# Altium PCB HTY-21024B V02.PcbDoc
Units mm, origin at the board's own origin, x right, y up, seen from the top; angles counter-clockwise.
Board outline 33.85 x 34.13 mm, 2 copper layers (Top Layer, Bottom Layer); 7 components, 5 nets, 18 pads, 1 vias.
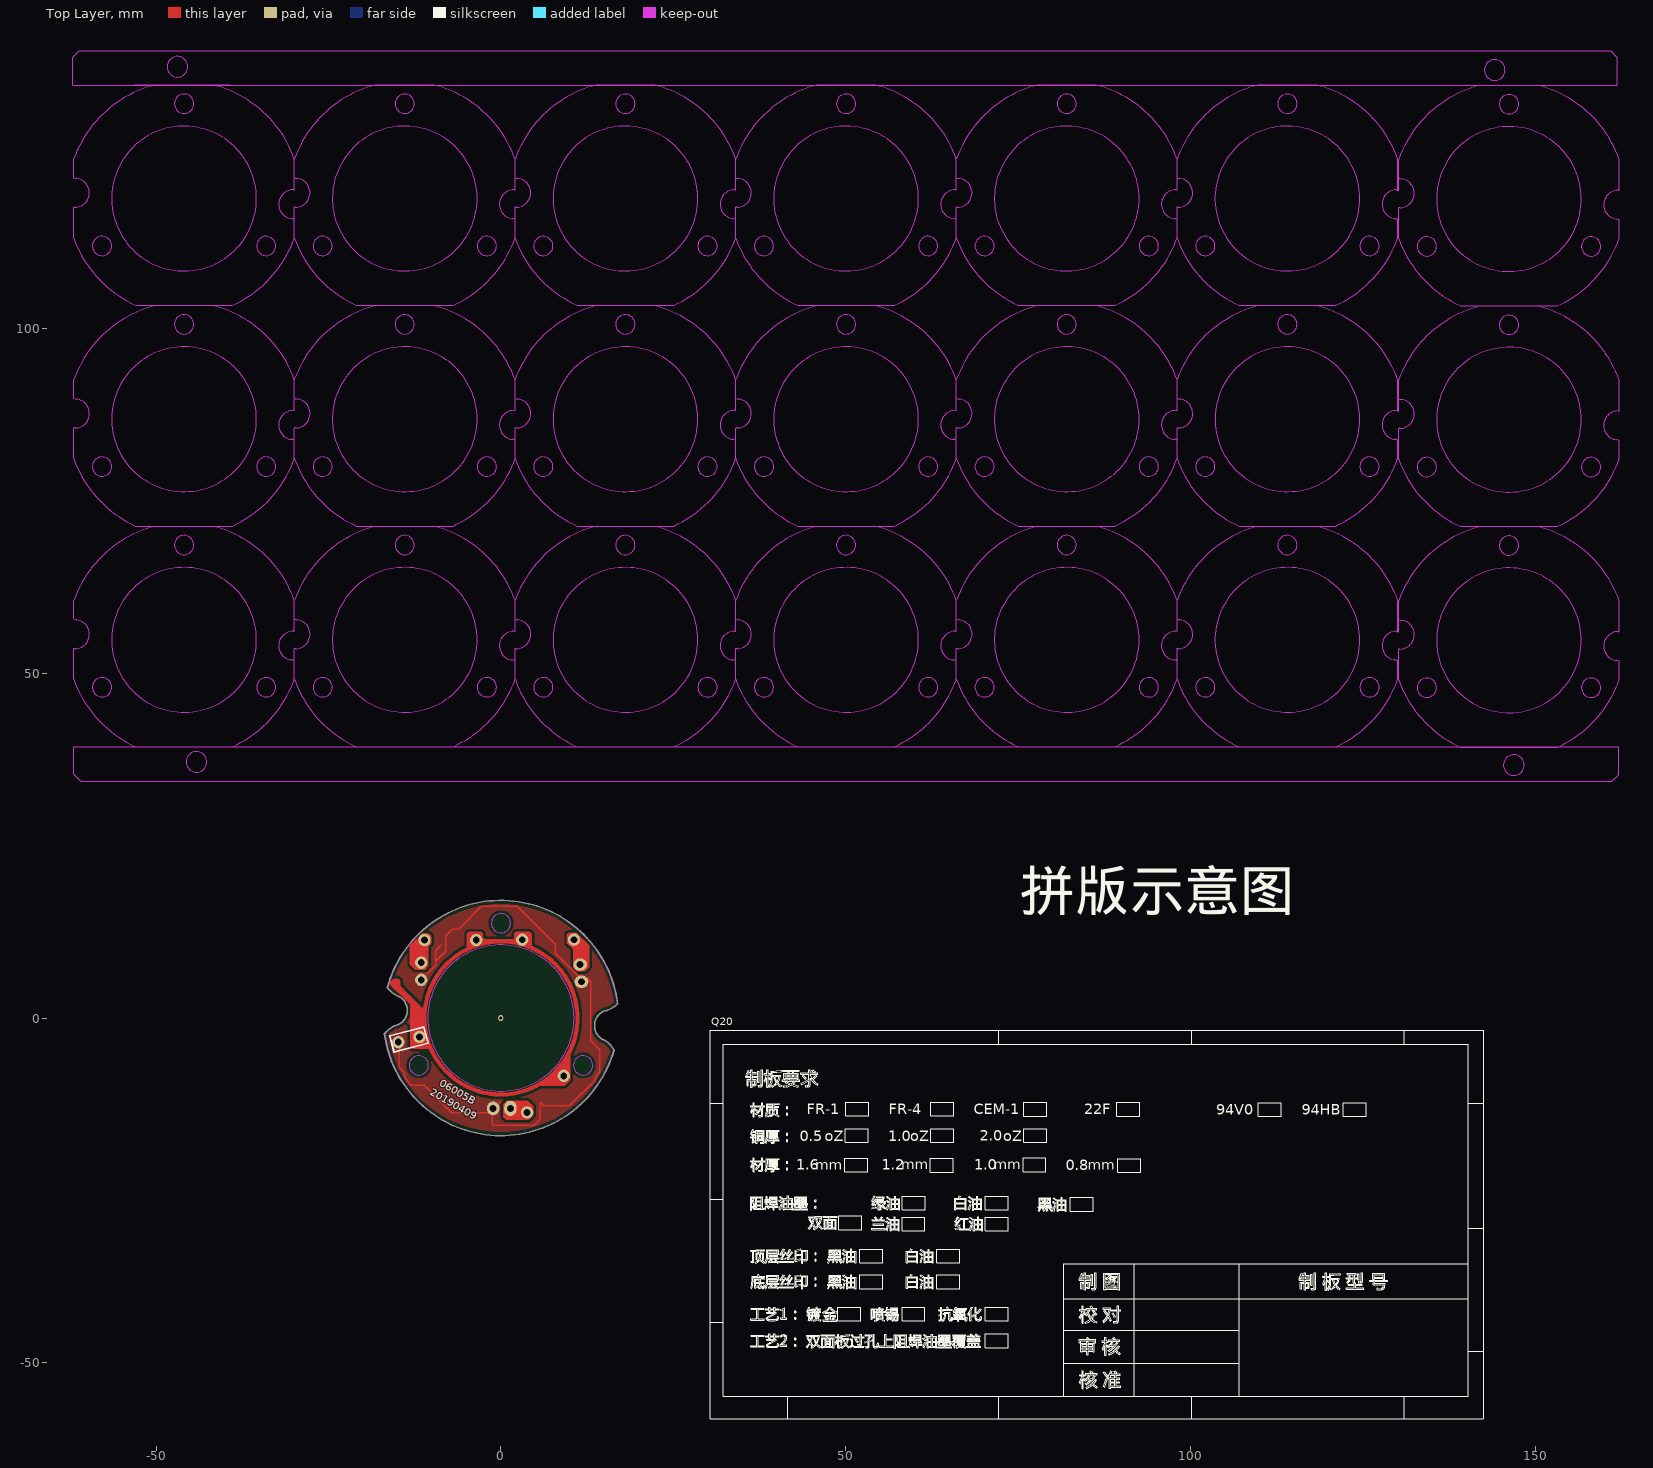
[diagram p0: Top Layer view]
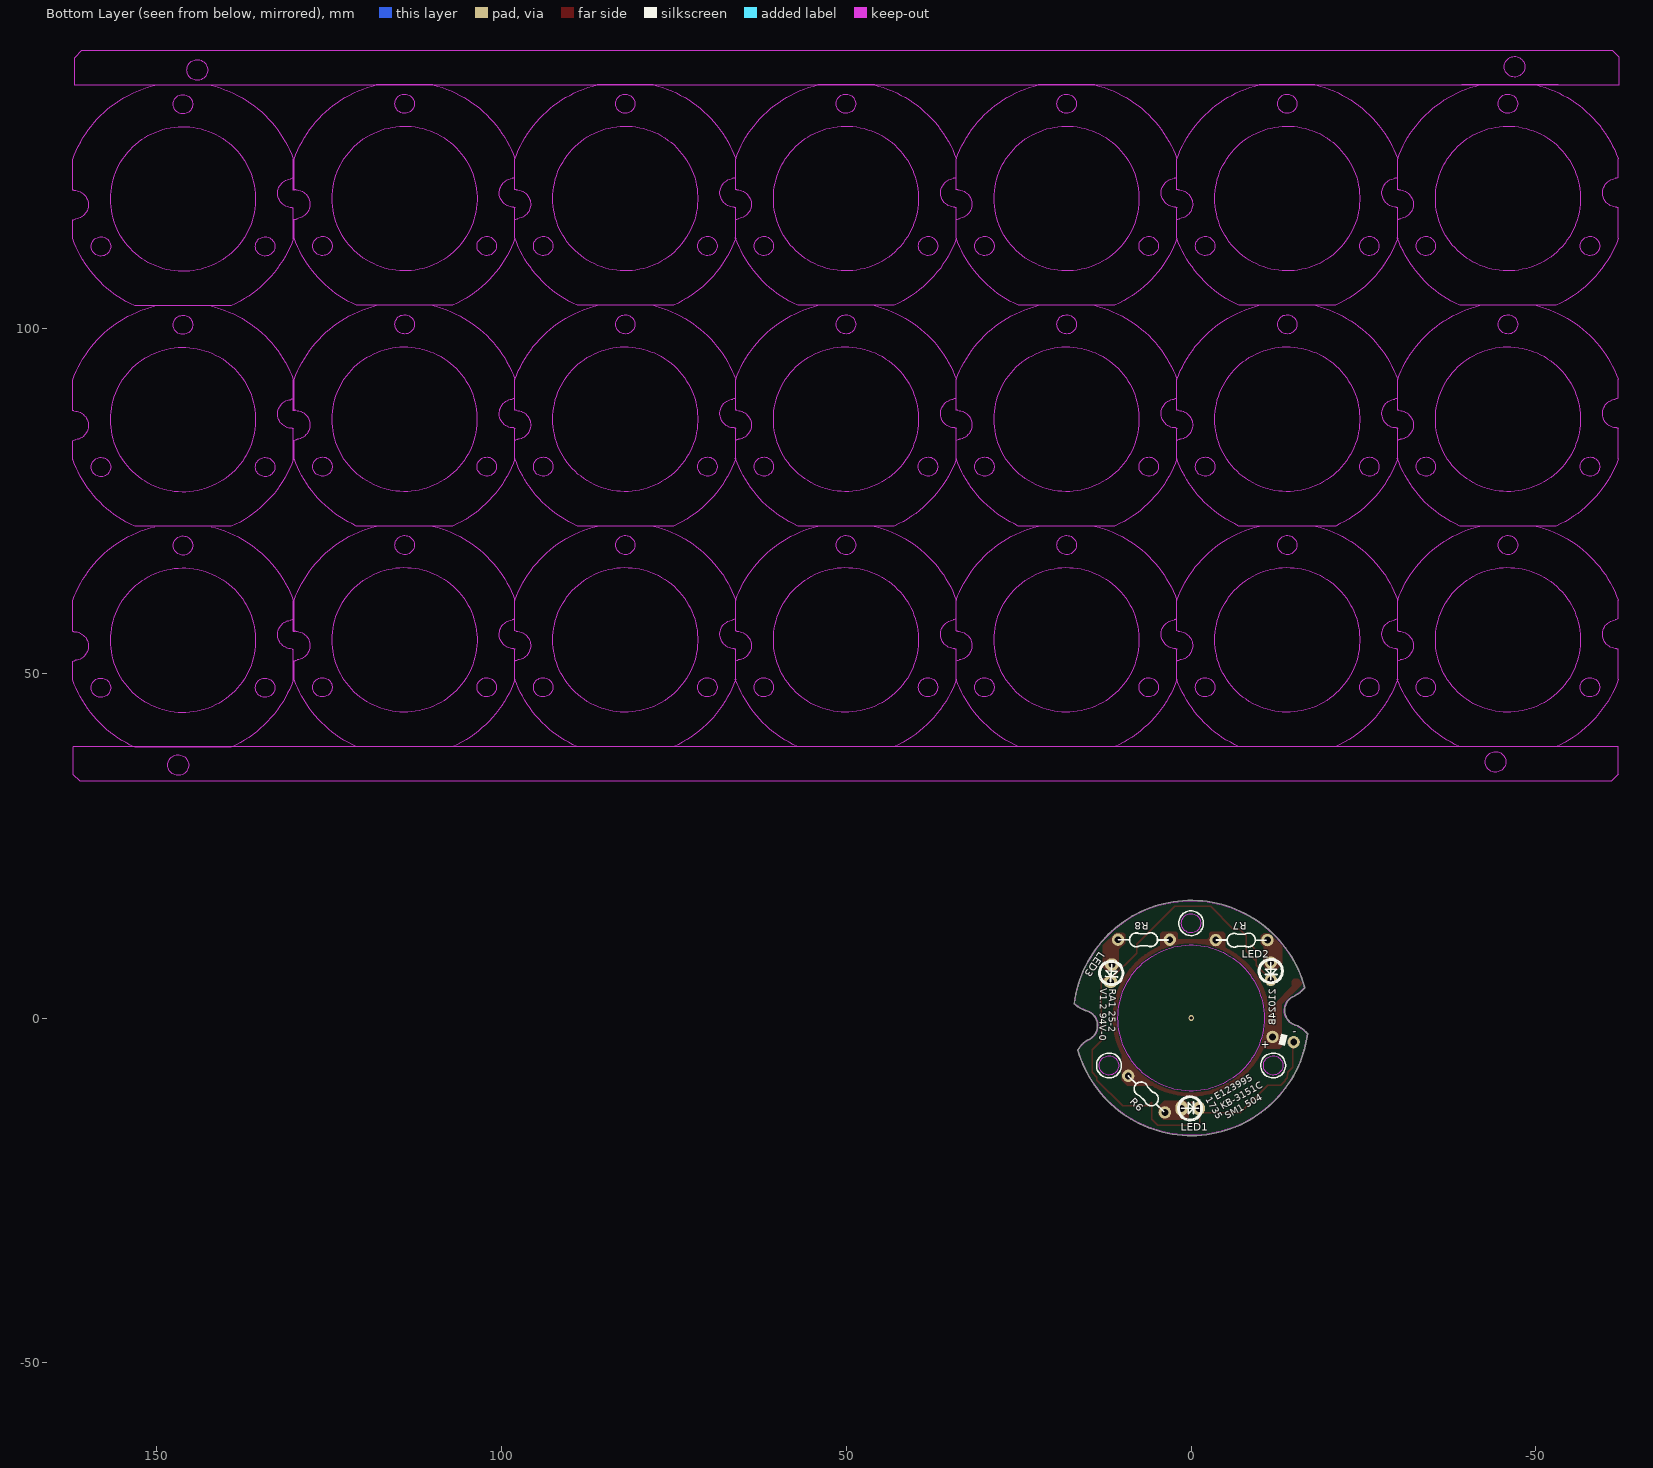
[diagram p1: Bottom Layer view, seen from below]

## Layer stack, top to bottom
Top Solder: solder mask 0.0102, Solder Resist, Dk 3.5
Top Layer: signal copper 0.0356
Dielectric 1: dielectric 0.32, FR-4, Dk 4.8
Bottom Layer: signal copper 0.0356
Bottom Solder: solder mask 0.0102, Solder Resist, Dk 3.5

## Board outline
-16.908,-2.297 cw(c-16.845,-2.288) -16.834,-2.226 cw(c-13.676,-4.776) -15.45,-1.125 cw(c-15.395,-1.156) -15.406,-1.094 ccw(c-15.811,1.105) -13.575,1.105 ccw(c-15.811,1.105) -15,3.189 ccw(c-15.811,1.105) -15,3.189 cw(c-14.977,3.249) -15.004,3.191 cw(c-13.261,6.857) -16.469,4.369 cw(c-16.418,4.409) -16.48,4.425 cw(c0,0) 16.936,2.089 cw(c16.872,2.081) 16.936,2.081 cw(c16.872,2.081) 16.913,2.032 cw(c14.086,4.944) 15.303,1.072 cw(c15.283,1.133) 15.297,1.07 cw(c15.811,-1.106) 15.298,1.071 15.297,1.07 ccw(c15.811,-1.106) 15.104,-3.227 ccw(c15.811,-1.106) 15.104,-3.227 cw(c15.084,-3.288) 15.119,-3.234 cw(c12.882,-6.622) 16.405,-4.605 cw(c16.35,-4.637) 16.413,-4.633 cw(c16.352,-4.65) 16.416,-4.65 cw(c16.352,-4.65) 16.413,-4.667 cw(c0,0)

## Design rules (kind name [scope] priority, off if disabled: settings)
Clearance [All] p1: gap=0.4
PlaneConnect [All] p1: planeconnectstyle=Direct reliefexpansion=0.508 reliefentries=4 reliefconductorwidth=0.254 reliefairgap=0.254
PolygonConnect [All] p1: connectstyle=Direct reliefconductorwidth=0.254 reliefentries=4 polygonreliefangle="90 Angle" airgapwidth=0.254
RoutingVias [All] p1: holewidth=0.711 width=1.27 viastyle="Through Hole" minholewidth=0.711 minwidth=1.27 maxholewidth=0.711 maxwidth=1.27
SolderMaskExpansion [All] p1: expansion=0.102
Width [All] p1: maxlimit=0.254 minlimit=0.254 preferedwidth=0.254
29 further rules are at their usual default settings.

## Components (designator, comment, footprint, x,y, rotation, side; value= is the part's Value field where it differs from the comment)
LED1 "" LED3#1 0.127,-13.106 r0 bottom
LED2 "" LED3#2 -11.557,6.782 r90 bottom
LED3 "" LED3#3 11.582,6.502 r94 bottom
Q20 "" Logo 50.495,-42.774 r0 top
R6 "" RR1/8W 9.113,-8.387 r225 bottom
R7 "" RR1/8W -3.581,11.303 r180 bottom
R8 "" RR1/8W 10.592,11.354 r180 bottom

## Footprints (in the part's own frame and the unit in brackets; to place one, negate y for a bottom-side part, rotate by r counter-clockwise, add the part's x,y. Pads: shape width x height; smd on the part's side, far side on the other; paste and mask are expansions set on the pad)
LED3#1 [mm] "3mm"
  oval 1.8x2.2 hole 1: 1(1.25,0)
  oval 1.8x2 hole 1: 2(-1.25,0)
  silkscreen extent -1.58,-1.6 1.62,1.6
LED3#2 [mm] "3mm"
  round 1.8 hole 1: 1(1.25,0) 2(-1.25,0)
  silkscreen extent -1.58,-1.6 1.62,1.6
LED3#3 [mm] "3mm"
  oval 1.8x2 hole 1: 1(1.25,0) 2(-1.25,0)
  silkscreen extent -1.58,-1.6 1.62,1.6
Logo [mm]
  round 0.069 on Top Overlay: 1(-1.614,-1.16) 1(-1.614,-1.16) 1(-1.614,0.802) 1(-1.614,0.802)
  silkscreen extent -20.13,-15.36 91.93,40.98
RR1/8W [mm]
  round 1.8 hole 1 mask+0: 1(0,0) 2(7.5,0)
  silkscreen extent 0.05,-1.02 7.3,1

## Free pads (board coordinates)
  round 1.8 hole 1 mask+0: 2(-14.884,-3.505) 3(-11.811,-2.743)

## Via types
v1: diameter 0.8, hole 0.5, Top Layer to Bottom Layer, tented both sides, 1 vias

## Nets (pads, with @x,y where several pads share a name; then routed paths per layer and width w, separated by ;. In a path a pad name is that pad's centre, name@x,y a point inside that pad or via, vN(x,y) a via of type N, cw(c..) or ccw(c..) an arc to the next point about the centre after c; other vN are vias at no path point)
NewNet1: LED1.1 R6.2 | length 2.9
  Top Layer w0.2: LED1.1@1.225,-13.742 1.733,-14.25 3.271,-14.25 3.398,-14.377 R6.2@3.861,-14.377
NewNet2: pad.3 R6.1 R7.1 R8.2 | length 80.6
  Top Layer w0.2: R7.1 R8.2@3.041,11.303
  Top Layer w0.254: pad.3 -10.949,-3.582 -10.611,-3.244
  Top Layer w0.6: -14.83,5.055 ccw(c-15.24,5.055) -14.83,5.055 ; -10.611,-3.244 ccw(c0,0) 11.096,0 ccw(c0,0) -10.611,-3.244
NewNet3: LED3.1 R8.1 | length 4.3
  Top Layer w0.2: R8.1 11.964,9.982 11.964,8.616 LED3.1@11.262,7.915
NewNet4: LED2.1 R7.2 | length 3.6
  Top Layer w0.254: LED2.1@-11.673,7.907 -11.673,10.711 R7.2
NewNet5: LED1.2 LED2.2 LED3.2 pad.2 | length 97.3
  Top Layer w0.2: -14.847,-2.303 -14.82,-2.278 ; pad.2@-14.757,-2.82 -14.757,-7.138 -14.021,-7.874 -14.021,-8.216 -13.959,-8.278 -13.959,-8.633 -13.662,-8.93 -13.662,-9.071 -13.005,-9.728 -11.15,-9.728 -7.137,-13.742 LED1.2@-1.275,-13.742 ; -9.463,8.215 -8.026,9.652 -8.026,11.912 -7.036,12.903 -6.147,12.903 -2.845,16.205 2.362,16.205 7.9,10.668 7.9,9.423 LED3.2@11.573,5.75 ; -0.025,-12.116 -1.275,-13.366 LED1.2@-1.275,-13.742 ; LED3.2@12.512,5.75 13.03,5.232 13.03,-3.302 14.351,-4.623 14.351,-7.899 13.662,-8.588 13.662,-8.995 9.932,-12.726 6.198,-12.726 5.715,-12.243 5.715,-14.681 4.852,-15.545 -1.067,-15.545 -1.275,-15.336 LED1.2@-1.275,-13.742
  Top Layer w0.254: LED2.2@-11.673,5.407 -11.673,5.437 -9.463,7.647 -9.463,8.215 -9.463,9.781 -8.701,10.543
pads on no net: Q20.1
copper on no net:
  other v1: 0,0

## Polygon pours and split planes (outlines as drawn)
NewNet5 on Top Layer "dg" (solid, remove dead copper, pour order 2): -16.838,-2.287 -16.838,-7.318 -11.252,-12.903 -7.213,-16.942 2.058,-16.942 7.163,-16.942 15.139,-8.966 16.764,-7.341 16.764,2.819 16.764,7.34 7.696,16.408 7.011,17.094 -0.838,17.094 -6.959,17.094 -15.24,8.814 -16.845,7.208 -16.845,-2.288
NewNet2 on Top Layer "dg" (solid, remove dead copper, pour order 0): -12.573,-1.651 -16.357,2.133 -16.357,4.343 -16.357,5.537 -15.875,6.02 -11.15,1.295 -11.15,1.143 -11.15,-0.381 -12.42,-1.651

## Keep-outs
Keep-Out Layer:
  circle w0.127: c-46.914,137.947 r1.5
  circle w0.127: c144.123,137.479 r1.5
  circle w0.127: c158.1,47.896 r1.4
  circle w0.127: c134.284,47.896 r1.4
  circle w0.127: c146.192,68.521 r1.4
  circle w0.127: c146.192,54.771 r10.5
  circle w0.127: c146.192,54.771 r10.5
  circle w0.127: c146.192,68.521 r1.4
  circle w0.127: c134.284,47.896 r1.4
  circle w0.127: c158.1,47.896 r1.4
  circle w0.127: c158.1,79.897 r1.4
  circle w0.127: c134.284,79.897 r1.4
  circle w0.127: c146.192,100.522 r1.4
  circle w0.127: c146.192,86.772 r10.5
  circle w0.127: c146.192,86.772 r10.5
  circle w0.127: c146.192,100.522 r1.4
  circle w0.127: c134.284,79.897 r1.4
  circle w0.127: c158.1,79.897 r1.4
  circle w0.127: c158.1,111.896 r1.4
  circle w0.127: c134.284,111.896 r1.4
  circle w0.127: c146.192,132.521 r1.4
  circle w0.127: c146.192,118.771 r10.5
  circle w0.127: c146.192,118.771 r10.5
  circle w0.127: c146.192,132.521 r1.4
  circle w0.127: c134.284,111.896 r1.4
  circle w0.127: c158.1,111.896 r1.4
  circle w0.127: c11.908,-6.875 r1.4
  circle w0.127: c-11.908,-6.875 r1.4
  circle w0.127: c0,13.75 r1.4
  circle w0.127: c0,0 r10.6
  circle w0.127: c-44.148,37.146 r1.5
  circle w0.127: c146.888,36.678 r1.5
  circle w0.127: c-34.041,111.963 r1.4
  circle w0.127: c-57.856,111.963 r1.4
  circle w0.127: c-45.948,132.588 r1.4
  circle w0.127: c-45.948,118.838 r10.5
  circle w0.127: c-45.948,118.838 r10.5
  circle w0.127: c-45.948,132.588 r1.4
  circle w0.127: c-57.856,111.963 r1.4
  circle w0.127: c-34.041,111.963 r1.4
  circle w0.127: c-2.041,111.963 r1.4
  circle w0.127: c-25.856,111.963 r1.4
  circle w0.127: c-13.948,132.588 r1.4
  circle w0.127: c-13.948,118.838 r10.5
  circle w0.127: c-13.948,118.838 r10.5
  circle w0.127: c-13.948,132.588 r1.4
  circle w0.127: c-25.856,111.963 r1.4
  circle w0.127: c-2.041,111.963 r1.4
  circle w0.127: c61.959,111.963 r1.4
  circle w0.127: c38.144,111.963 r1.4
  circle w0.127: c50.052,132.588 r1.4
  circle w0.127: c50.052,118.838 r10.5
  circle w0.127: c50.052,118.838 r10.5
  circle w0.127: c50.052,132.588 r1.4
  circle w0.127: c38.144,111.963 r1.4
  circle w0.127: c61.959,111.963 r1.4
  circle w0.127: c29.959,111.963 r1.4
  circle w0.127: c6.144,111.963 r1.4
  circle w0.127: c18.052,132.588 r1.4
  circle w0.127: c18.052,118.838 r10.5
  circle w0.127: c18.052,118.838 r10.5
  circle w0.127: c18.052,132.588 r1.4
  circle w0.127: c6.144,111.963 r1.4
  circle w0.127: c29.959,111.963 r1.4
  circle w0.127: c125.959,111.963 r1.4
  circle w0.127: c102.144,111.963 r1.4
  circle w0.127: c114.052,132.588 r1.4
  circle w0.127: c114.052,118.838 r10.5
  circle w0.127: c114.052,118.838 r10.5
  circle w0.127: c114.052,132.588 r1.4
  circle w0.127: c102.144,111.963 r1.4
  circle w0.127: c125.959,111.963 r1.4
  circle w0.127: c93.959,111.963 r1.4
  circle w0.127: c70.144,111.963 r1.4
  circle w0.127: c82.052,132.588 r1.4
  circle w0.127: c82.052,118.838 r10.5
  circle w0.127: c82.052,118.838 r10.5
  circle w0.127: c82.052,132.588 r1.4
  circle w0.127: c70.144,111.963 r1.4
  circle w0.127: c93.959,111.963 r1.4
  circle w0.127: c-34.04,79.964 r1.4
  circle w0.127: c-57.856,79.964 r1.4
  circle w0.127: c-45.948,100.589 r1.4
  circle w0.127: c-45.948,86.839 r10.5
  circle w0.127: c-45.948,86.839 r10.5
  circle w0.127: c-45.948,100.589 r1.4
  circle w0.127: c-57.856,79.964 r1.4
  circle w0.127: c-34.04,79.964 r1.4
  circle w0.127: c-2.04,79.964 r1.4
  circle w0.127: c-25.856,79.964 r1.4
  circle w0.127: c-13.948,100.589 r1.4
  circle w0.127: c-13.948,86.839 r10.5
  circle w0.127: c-13.948,86.839 r10.5
  circle w0.127: c-13.948,100.589 r1.4
  circle w0.127: c-25.856,79.964 r1.4
  circle w0.127: c-2.04,79.964 r1.4
  circle w0.127: c61.96,79.964 r1.4
  circle w0.127: c38.144,79.964 r1.4
  circle w0.127: c50.052,100.589 r1.4
  circle w0.127: c50.052,86.839 r10.5
  circle w0.127: c50.052,86.839 r10.5
  circle w0.127: c50.052,100.589 r1.4
  circle w0.127: c38.144,79.964 r1.4
  circle w0.127: c61.96,79.964 r1.4
  circle w0.127: c29.96,79.964 r1.4
  circle w0.127: c6.144,79.964 r1.4
  circle w0.127: c18.052,100.589 r1.4
  circle w0.127: c18.052,86.839 r10.5
  circle w0.127: c18.052,86.839 r10.5
  circle w0.127: c18.052,100.589 r1.4
  circle w0.127: c6.144,79.964 r1.4
  circle w0.127: c29.96,79.964 r1.4
  circle w0.127: c125.96,79.964 r1.4
  circle w0.127: c102.144,79.964 r1.4
  circle w0.127: c114.052,100.589 r1.4
  circle w0.127: c114.052,86.839 r10.5
  circle w0.127: c114.052,86.839 r10.5
  circle w0.127: c114.052,100.589 r1.4
  circle w0.127: c102.144,79.964 r1.4
  circle w0.127: c125.96,79.964 r1.4
  circle w0.127: c93.96,79.964 r1.4
  circle w0.127: c70.144,79.964 r1.4
  circle w0.127: c82.052,100.589 r1.4
  circle w0.127: c82.052,86.839 r10.5
  circle w0.127: c82.052,86.839 r10.5
  circle w0.127: c82.052,100.589 r1.4
  circle w0.127: c70.144,79.964 r1.4
  circle w0.127: c93.96,79.964 r1.4
  circle w0.127: c93.959,47.963 r1.4
  circle w0.127: c70.144,47.963 r1.4
  circle w0.127: c82.052,68.588 r1.4
  circle w0.127: c82.052,54.838 r10.5
  circle w0.127: c82.052,54.838 r10.5
  circle w0.127: c82.052,68.588 r1.4
  circle w0.127: c70.144,47.963 r1.4
  circle w0.127: c93.959,47.963 r1.4
  circle w0.127: c125.959,47.963 r1.4
  circle w0.127: c102.144,47.963 r1.4
  circle w0.127: c114.052,68.588 r1.4
  circle w0.127: c114.052,54.838 r10.5
  circle w0.127: c114.052,54.838 r10.5
  circle w0.127: c114.052,68.588 r1.4
  circle w0.127: c102.144,47.963 r1.4
  circle w0.127: c125.959,47.963 r1.4
  circle w0.127: c29.959,47.963 r1.4
  circle w0.127: c6.144,47.963 r1.4
  circle w0.127: c18.052,68.588 r1.4
  circle w0.127: c18.052,54.838 r10.5
  circle w0.127: c18.052,54.838 r10.5
  circle w0.127: c18.052,68.588 r1.4
  circle w0.127: c6.144,47.963 r1.4
  circle w0.127: c29.959,47.963 r1.4
  circle w0.127: c61.959,47.963 r1.4
  circle w0.127: c38.144,47.963 r1.4
  circle w0.127: c50.052,68.588 r1.4
  circle w0.127: c50.052,54.838 r10.5
  circle w0.127: c50.052,54.838 r10.5
  circle w0.127: c50.052,68.588 r1.4
  circle w0.127: c38.144,47.963 r1.4
  circle w0.127: c61.959,47.963 r1.4
  circle w0.127: c-2.041,47.963 r1.4
  circle w0.127: c-25.856,47.963 r1.4
  circle w0.127: c-13.948,68.588 r1.4
  circle w0.127: c-13.948,54.838 r10.5
  circle w0.127: c-13.948,54.838 r10.5
  circle w0.127: c-13.948,68.588 r1.4
  circle w0.127: c-25.856,47.963 r1.4
  circle w0.127: c-2.041,47.963 r1.4
  circle w0.127: c-34.041,47.963 r1.4
  circle w0.127: c-57.856,47.963 r1.4
  circle w0.127: c-45.948,68.588 r1.4
  circle w0.127: c-45.948,54.838 r10.5
  circle w0.127: c-45.948,54.838 r10.5
  circle w0.127: c-45.948,68.588 r1.4
  circle w0.127: c-57.856,47.963 r1.4
  circle w0.127: c-34.041,47.963 r1.4
  lines w0.127: -61.954,53.549 -61.954,49.108 ; -61.954,57.873 -61.954,60.607 ; -61.953,85.549 -61.953,81.109 ; -61.953,89.873 -61.953,92.607 ; -61.954,117.549 -61.954,113.108 ; -61.954,121.873 -61.954,124.607 ; -30.137,56.112 ccw(c-30.111,57.111) -29.945,56.125 ; -30.136,88.112 ccw(c-30.11,89.112) -29.945,88.126 ; -30.137,120.112 ccw(c-30.111,121.111) -29.945,120.125 ; -29.954,49.046 -29.954,51.807 ; -29.954,53.549 -29.954,49.108 ; -29.954,56.125 -29.954,60.55 ; -29.954,57.873 -29.954,60.607 ; -29.954,113.046 -29.954,115.807 ; -29.954,117.549 -29.954,113.108 ; -29.954,120.125 -29.954,124.55 ; -29.954,121.873 -29.954,124.607 ; -29.953,81.046 -29.953,83.808 ; -29.953,85.549 -29.953,81.109 ; -29.953,88.126 -29.953,92.551 ; -29.953,89.873 -29.953,92.607 ; -17.952,135.337 -9.851,135.337 ; -16.845,-2.288 ccw(c0,0) 16.352,-4.65 ; -16.834,-2.328 cw(c-13.676,-4.776) -15.392,-1.168 ; -15.395,-1.156 ccw(c-15.811,1.105) -14.977,3.249 cw(c-13.261,6.857) -16.418,4.409 cw(c0,0) 16.872,2.081 ; 1.863,56.112 ccw(c1.889,57.111) 2.055,56.125 ; 1.864,88.112 ccw(c1.89,89.112) 2.055,88.126 ; 1.863,120.112 ccw(c1.889,121.111) 2.055,120.125 ; 2.046,49.046 2.046,51.807 ; 2.046,53.549 2.046,49.108 ; 2.046,56.125 2.046,60.55 ; 2.046,57.873 2.046,60.607 ; 2.047,81.046 2.047,83.808 ; 2.047,85.549 2.047,81.109 ; 2.047,88.126 2.047,92.551 ; 2.047,89.873 2.047,92.607 ; 2.046,113.046 2.046,115.807 ; 2.046,117.549 2.046,113.108 ; 2.046,120.125 2.046,124.55 ; 2.046,121.873 2.046,124.607 ; 16.35,-4.637 ccw(c12.882,-6.622) 15.084,-3.288 cw(c15.811,-1.106) 15.283,1.133 ccw(c14.086,4.944) 16.872,2.081 ; 33.863,56.112 ccw(c33.889,57.111) 34.055,56.125 ; 33.864,88.112 ccw(c33.89,89.112) 34.055,88.126 ; 33.863,120.112 ccw(c33.889,121.111) 34.055,120.125 ; 34.046,49.046 34.046,51.807 ; 34.046,53.549 34.046,49.108 ; 34.046,56.125 34.046,60.55 ; 34.046,57.873 34.046,60.607 ; 34.047,81.046 34.047,83.808 ; 34.047,85.549 34.047,81.109 ; 34.047,88.126 34.047,92.551 ; 34.047,89.873 34.047,92.607 ; 34.046,113.046 34.046,115.807 ; 34.046,117.549 34.046,113.108 ; 34.046,120.125 34.046,124.55 ; 34.046,121.873 34.046,124.607 ; 45.853,135.337 54.149,135.337 ; 65.863,56.112 ccw(c65.889,57.111) 66.055,56.125 ; 65.864,88.112 ccw(c65.89,89.112) 66.055,88.126 ; 65.863,120.112 ccw(c65.889,121.111) 66.055,120.125 ; 66.046,49.046 66.046,51.807 ; 66.046,53.549 66.046,49.108 ; 66.046,56.125 66.046,60.55 ; 66.046,57.873 66.046,60.607 ; 66.047,81.046 66.047,83.808 ; 66.047,85.549 66.047,81.109 ; 66.047,88.126 66.047,92.551 ; 66.047,89.873 66.047,92.607 ; 66.046,113.046 66.046,115.807 ; 66.046,117.549 66.046,113.108 ; 66.046,120.125 66.046,124.55 ; 66.046,121.873 66.046,124.607 ; 77.984,135.337 86.149,135.337 ; 97.863,56.112 ccw(c97.889,57.111) 98.055,56.125 ; 97.864,88.112 ccw(c97.89,89.112) 98.055,88.126 ; 97.863,120.112 ccw(c97.889,121.111) 98.055,120.125 ; 98.046,49.046 98.046,51.807 ; 98.046,53.549 98.046,49.108 ; 98.046,56.125 98.046,60.55 ; 98.046,57.873 98.046,60.607 ; 98.047,81.046 98.047,83.808 ; 98.047,85.549 98.047,81.109 ; 98.047,88.126 98.047,92.551 ; 98.047,89.873 98.047,92.607 ; 98.046,113.046 98.046,115.807 ; 98.046,117.549 98.046,113.108 ; 98.046,120.125 98.046,124.55 ; 98.046,121.873 98.046,124.607 ; 129.863,56.112 ccw(c129.889,57.111) 130.055,56.125 ; 129.864,88.112 ccw(c129.89,89.112) 130.055,88.126 ; 129.863,120.112 ccw(c129.889,121.111) 130.055,120.125 ; 130.004,56.045 ccw(c130.03,57.044) 130.195,56.058 ; 130.004,88.045 ccw(c130.03,89.045) 130.195,88.059 ; 130.004,120.045 ccw(c130.03,121.044) 130.195,120.058 ; 130.046,49.046 130.046,51.807 ; 130.046,56.125 130.046,60.55 ; 130.047,81.046 130.047,83.808 ; 130.047,88.126 130.047,92.551 ; 130.046,113.046 130.046,115.807 ; 130.046,120.125 130.046,124.55 ; 130.187,48.979 130.187,51.74 ; 130.187,53.482 130.187,49.041 ; 130.187,56.058 130.187,60.483 ; 130.187,57.806 130.187,60.54 ; 130.187,80.979 130.187,83.74 ; 130.187,85.482 130.187,81.042 ; 130.187,88.059 130.187,92.483 ; 130.187,89.806 130.187,92.54 ; 130.187,112.979 130.187,115.74 ; 130.187,117.482 130.187,113.041 ; 130.187,120.058 130.187,124.483 ; 130.187,121.806 130.187,124.54 ; 162.004,56.045 ccw(c162.03,57.044) 162.195,56.058 ; 162.004,88.045 ccw(c162.03,89.045) 162.195,88.059 ; 162.004,120.045 ccw(c162.03,121.044) 162.195,120.058 ; 162.187,48.979 162.187,51.74 ; 162.187,56.058 162.187,60.483 ; 162.187,57.806 162.187,60.54 ; 162.187,80.979 162.187,83.74 ; 162.187,88.059 162.187,92.483 ; 162.187,89.806 162.187,92.54 ; 162.187,112.979 162.187,115.74 ; 162.187,120.058 162.187,124.483 ; 162.187,121.806 162.187,124.54 ; -61.954,49.108 ccw(c-45.948,54.838) -52.948,39.346 cw(c-45.948,54.838) -61.954,49.108 ; -61.953,81.109 ccw(c-45.948,86.839) -52.948,71.347 cw(c-45.948,86.839) -61.953,81.109 ; -61.954,113.108 ccw(c-45.948,118.838) -52.948,103.346 ; -61.954,113.108 ccw(c-45.948,118.838) -52.948,103.346 ; -52.948,103.346 -38.948,103.346 ; -52.948,103.346 -38.948,103.346 ; -50.046,135.337 ccw(c-45.948,118.838) -61.94,124.607 cw(c-45.948,118.838) -50.046,135.337 ; -50.046,135.337 -41.851,135.337 ; -41.851,135.337 cw(c-45.948,118.838) -29.937,124.55 ccw(c-45.948,118.838) -41.851,135.337 ; -38.949,103.346 ccw(c-45.948,118.838) -29.932,113.14 cw(c-45.948,118.838) -38.949,103.346 ; -29.954,49.108 ccw(c-13.948,54.838) -20.948,39.346 cw(c-13.948,54.838) -29.954,49.108 ; -29.954,113.108 ccw(c-13.948,118.838) -20.948,103.346 ; -29.954,113.108 ccw(c-13.948,118.838) -20.948,103.346 ; -29.953,81.109 ccw(c-13.948,86.839) -20.948,71.347 cw(c-13.948,86.839) -29.953,81.109 ; -20.948,103.346 -6.948,103.346 -20.948,103.346 ; -9.851,135.337 cw(c-13.948,118.838) 2.063,124.55 ccw(c-13.948,118.838) -9.851,135.337 ; 2.046,49.108 ccw(c18.052,54.838) 11.052,39.346 cw(c18.052,54.838) 2.046,49.108 ; 2.047,81.109 ccw(c18.052,86.839) 11.052,71.347 cw(c18.052,86.839) 2.047,81.109 ; 2.046,113.108 ccw(c18.052,118.838) 11.052,103.346 ; 2.046,113.108 ccw(c18.052,118.838) 11.052,103.346 ; 11.052,103.346 25.052,103.346 11.052,103.346 ; 13.954,135.337 ccw(c18.052,118.838) 2.06,124.607 cw(c18.052,118.838) 13.954,135.337 ; 13.954,135.337 22.149,135.337 ; 22.149,135.337 cw(c18.052,118.838) 34.063,124.55 ccw(c18.052,118.838) 22.149,135.337 ; 34.046,49.108 ccw(c50.052,54.838) 43.052,39.346 cw(c50.052,54.838) 34.046,49.108 ; 34.047,81.109 ccw(c50.052,86.839) 43.052,71.347 cw(c50.052,86.839) 34.047,81.109 ; 34.046,113.108 ccw(c50.052,118.838) 43.052,103.346 ; 34.046,113.108 ccw(c50.052,118.838) 43.052,103.346 ; 43.052,103.346 57.052,103.346 ; 43.052,103.346 57.052,103.346 ; 54.149,135.337 cw(c50.052,118.838) 66.063,124.55 ccw(c50.052,118.838) 54.149,135.337 ; 57.051,103.346 ccw(c50.052,118.838) 66.068,113.14 cw(c50.052,118.838) 57.051,103.346 ; 66.046,49.108 ccw(c82.052,54.838) 75.052,39.346 cw(c82.052,54.838) 66.046,49.108 ; 66.047,81.109 ccw(c82.052,86.839) 75.052,71.347 cw(c82.052,86.839) 66.047,81.109 ; 66.046,113.108 ccw(c82.052,118.838) 75.052,103.346 ; 66.046,113.108 ccw(c82.052,118.838) 75.052,103.346 ; 75.052,103.346 89.052,103.346 ; 75.052,103.346 89.052,103.346 ; 86.149,135.337 cw(c82.052,118.838) 98.063,124.55 ccw(c82.052,118.838) 86.149,135.337 ; 89.051,103.346 ccw(c82.052,118.838) 98.068,113.14 cw(c82.052,118.838) 89.051,103.346 ; 98.046,49.108 ccw(c114.052,54.838) 107.052,39.346 cw(c114.052,54.838) 98.046,49.108 ; 98.047,81.109 ccw(c114.052,86.839) 107.052,71.347 cw(c114.052,86.839) 98.047,81.109 ; 98.046,113.108 ccw(c114.052,118.838) 107.052,103.346 cw(c114.052,118.838) 98.046,113.108 ; 109.954,135.337 ccw(c114.052,118.838) 98.06,124.607 cw(c114.052,118.838) 109.954,135.337 ; 109.954,135.337 118.149,135.337 ; 118.149,135.337 cw(c114.052,118.838) 130.063,124.55 ccw(c114.052,118.838) 118.149,135.337 ; 121.051,103.346 ccw(c114.052,118.838) 130.068,113.14 cw(c114.052,118.838) 121.051,103.346 ; 121.052,103.346 107.052,103.346 121.052,103.346 ; 130.187,49.041 ccw(c146.192,54.771) 139.192,39.279 cw(c146.192,54.771) 130.187,49.041 ; 130.187,81.042 ccw(c146.192,86.772) 139.192,71.28 cw(c146.192,86.772) 130.187,81.042 ; 130.187,113.041 ccw(c146.192,118.771) 139.192,103.279 ; 130.187,113.041 ccw(c146.192,118.771) 139.192,103.279 ; 139.192,103.279 153.192,103.279 ; 139.192,103.279 153.192,103.279 ; 142.094,135.27 ccw(c146.192,118.771) 130.2,124.54 cw(c146.192,118.771) 142.094,135.27 ; 142.094,135.27 150.29,135.27 ; 150.29,135.27 cw(c146.192,118.771) 162.204,124.483 ccw(c146.192,118.771) 150.29,135.27 ; 153.192,103.279 ccw(c146.192,118.771) 162.208,113.073 cw(c146.192,118.771) 153.192,103.279 ; -62.101,135.279 -30.077,135.279 161.923,135.279 161.923,139.279 160.923,140.279 -29.077,140.279 -61.143,140.279 -62.101,139.321 -62.101,135.279 ; -61.967,53.549 cw(c-61.786,52.565) -61.76,53.565 ccw(c-61.786,52.565) -61.967,53.549 ; -61.967,85.549 cw(c-61.786,84.566) -61.76,85.566 ccw(c-61.786,84.566) -61.967,85.549 ; -61.967,117.549 cw(c-61.786,116.565) -61.76,117.565 ccw(c-61.786,116.565) -61.967,117.549 ; -61.948,35.346 -60.948,34.346 129.052,34.346 161.118,34.346 162.076,35.304 162.076,39.346 130.052,39.346 -61.948,39.346 -61.948,35.346 ; -61.94,60.607 cw(c-45.948,54.838) -50.046,71.337 ccw(c-45.948,54.838) -61.94,60.607 ; -61.94,92.607 cw(c-45.948,86.839) -50.046,103.338 ccw(c-45.948,86.839) -61.94,92.607 ; -61.934,57.873 ccw(c-61.462,58.755) -61.541,57.758 cw(c-61.462,58.755) -61.934,57.873 ; -61.934,89.873 ccw(c-61.462,90.755) -61.54,89.758 cw(c-61.462,90.755) -61.934,89.873 ; -61.934,121.873 ccw(c-61.462,122.755) -61.541,121.758 cw(c-61.462,122.755) -61.934,121.873 ; -61.76,53.568 ccw(c-61.777,55.668) -61.541,57.755 cw(c-61.777,55.668) -61.76,53.568 ; -61.76,85.569 ccw(c-61.776,87.669) -61.541,89.755 cw(c-61.776,87.669) -61.76,85.569 ; -61.76,117.568 ccw(c-61.777,119.668) -61.541,121.755 cw(c-61.777,119.668) -61.76,117.568 ; -53.218,135.346 -39.218,135.346 -53.218,135.346 ; -52.948,39.346 -38.948,39.346 -52.948,39.346 ; -52.948,71.346 -38.948,71.346 -52.948,71.346 ; -50.048,71.346 -41.848,71.346 -50.048,71.346 ; -50.048,103.346 -41.848,103.346 -50.048,103.346 ; -41.851,71.337 cw(c-45.948,54.838) -29.937,60.55 ccw(c-45.948,54.838) -41.851,71.337 ; -41.85,103.338 cw(c-45.948,86.839) -29.936,92.551 ccw(c-45.948,86.839) -41.85,103.338 ; -38.949,39.346 ccw(c-45.948,54.838) -29.932,49.14 cw(c-45.948,54.838) -38.949,39.346 ; -38.948,71.347 ccw(c-45.948,86.839) -29.932,81.141 cw(c-45.948,86.839) -38.948,71.347 ; -30.356,51.919 cw(c-30.435,50.922) -29.969,51.807 ccw(c-30.435,50.922) -30.356,51.919 ; -30.356,83.92 cw(c-30.435,82.923) -29.969,83.808 ccw(c-30.435,82.923) -30.356,83.92 ; -30.356,115.919 cw(c-30.435,114.922) -29.969,115.807 ccw(c-30.435,114.922) -30.356,115.919 ; -30.356,51.922 cw(c-30.12,54.009) -30.137,56.109 ccw(c-30.12,54.009) -30.356,51.922 ; -30.356,83.923 cw(c-30.12,86.009) -30.136,88.109 ccw(c-30.12,86.009) -30.356,83.923 ; -30.356,115.922 cw(c-30.12,118.009) -30.137,120.109 ccw(c-30.12,118.009) -30.356,115.922 ; -29.967,53.549 cw(c-29.786,52.565) -29.76,53.565 ccw(c-29.786,52.565) -29.967,53.549 ; -29.967,117.549 cw(c-29.786,116.565) -29.76,117.565 ccw(c-29.786,116.565) -29.967,117.549 ; -29.967,85.549 cw(c-29.786,84.566) -29.76,85.566 ccw(c-29.786,84.566) -29.967,85.549 ; -29.94,60.607 cw(c-13.948,54.838) -18.046,71.337 ccw(c-13.948,54.838) -29.94,60.607 ; -29.94,92.607 cw(c-13.948,86.839) -18.046,103.338 ccw(c-13.948,86.839) -29.94,92.607 ; -29.94,124.607 cw(c-13.948,118.838) -18.046,135.337 ccw(c-13.948,118.838) -29.94,124.607 ; -29.934,57.873 ccw(c-29.462,58.755) -29.541,57.758 cw(c-29.462,58.755) -29.934,57.873 ; -29.934,89.873 ccw(c-29.462,90.755) -29.54,89.758 cw(c-29.462,90.755) -29.934,89.873 ; -29.934,121.873 ccw(c-29.462,122.755) -29.541,121.758 cw(c-29.462,122.755) -29.934,121.873 ; -29.76,53.568 ccw(c-29.777,55.668) -29.541,57.755 cw(c-29.777,55.668) -29.76,53.568 ; -29.76,85.569 ccw(c-29.776,87.669) -29.541,89.755 cw(c-29.776,87.669) -29.76,85.569 ; -29.76,117.568 ccw(c-29.777,119.668) -29.541,121.755 cw(c-29.777,119.668) -29.76,117.568 ; -21.077,135.279 -7.077,135.279 -21.077,135.279 ; -20.948,39.346 -6.948,39.346 -20.948,39.346 ; -20.948,71.346 -6.948,71.346 -20.948,71.346 ; -18.048,71.346 -9.848,71.346 -18.048,71.346 ; -18.048,103.346 -9.848,103.346 -18.048,103.346 ; -9.851,71.337 cw(c-13.948,54.838) 2.063,60.55 ccw(c-13.948,54.838) -9.851,71.337 ; -9.85,103.338 cw(c-13.948,86.839) 2.064,92.551 ccw(c-13.948,86.839) -9.85,103.338 ; -6.949,39.346 ccw(c-13.948,54.838) 2.068,49.14 cw(c-13.948,54.838) -6.949,39.346 ; -6.949,103.346 ccw(c-13.948,118.838) 2.068,113.14 cw(c-13.948,118.838) -6.949,103.346 ; -6.948,71.347 ccw(c-13.948,86.839) 2.068,81.141 cw(c-13.948,86.839) -6.948,71.347 ; 1.644,51.919 cw(c1.565,50.922) 2.031,51.807 ccw(c1.565,50.922) 1.644,51.919 ; 1.644,51.922 cw(c1.88,54.009) 1.863,56.109 ccw(c1.88,54.009) 1.644,51.922 ; 1.644,83.92 cw(c1.565,82.923) 2.031,83.808 ccw(c1.565,82.923) 1.644,83.92 ; 1.644,115.919 cw(c1.565,114.922) 2.031,115.807 ccw(c1.565,114.922) 1.644,115.919 ; 1.644,115.922 cw(c1.88,118.009) 1.863,120.109 ccw(c1.88,118.009) 1.644,115.922 ; 1.644,83.923 cw(c1.88,86.009) 1.864,88.109 ccw(c1.88,86.009) 1.644,83.923 ; 2.033,53.549 cw(c2.214,52.565) 2.24,53.565 ccw(c2.214,52.565) 2.033,53.549 ; 2.033,117.549 cw(c2.214,116.565) 2.24,117.565 ccw(c2.214,116.565) 2.033,117.549 ; 2.033,85.549 cw(c2.214,84.566) 2.24,85.566 ccw(c2.214,84.566) 2.033,85.549 ; 2.06,60.607 cw(c18.052,54.838) 13.954,71.337 ccw(c18.052,54.838) 2.06,60.607 ; 2.06,92.607 cw(c18.052,86.839) 13.954,103.338 ccw(c18.052,86.839) 2.06,92.607 ; 2.066,57.873 ccw(c2.538,58.755) 2.459,57.758 cw(c2.538,58.755) 2.066,57.873 ; 2.066,89.873 ccw(c2.538,90.755) 2.46,89.758 cw(c2.538,90.755) 2.066,89.873 ; 2.066,121.873 ccw(c2.538,122.755) 2.459,121.758 cw(c2.538,122.755) 2.066,121.873 ; 2.24,53.568 ccw(c2.223,55.668) 2.459,57.755 cw(c2.223,55.668) 2.24,53.568 ; 2.24,117.568 ccw(c2.223,119.668) 2.459,121.755 cw(c2.223,119.668) 2.24,117.568 ; 2.24,85.569 ccw(c2.224,87.669) 2.459,89.755 cw(c2.224,87.669) 2.24,85.569 ; 10.923,135.279 24.923,135.279 10.923,135.279 ; 11.052,39.346 25.052,39.346 11.052,39.346 ; 11.052,71.346 25.052,71.346 11.052,71.346 ; 13.952,71.346 22.152,71.346 13.952,71.346 ; 13.952,103.346 22.152,103.346 13.952,103.346 ; 22.149,71.337 cw(c18.052,54.838) 34.063,60.55 ccw(c18.052,54.838) 22.149,71.337 ; 22.15,103.338 cw(c18.052,86.839) 34.064,92.551 ccw(c18.052,86.839) 22.15,103.338 ; 25.051,39.346 ccw(c18.052,54.838) 34.068,49.14 cw(c18.052,54.838) 25.051,39.346 ; 25.051,103.346 ccw(c18.052,118.838) 34.068,113.14 cw(c18.052,118.838) 25.051,103.346 ; 25.052,71.347 ccw(c18.052,86.839) 34.068,81.141 cw(c18.052,86.839) 25.052,71.347 ; 33.644,51.919 cw(c33.565,50.922) 34.031,51.807 ccw(c33.565,50.922) 33.644,51.919 ; 33.644,51.922 cw(c33.88,54.009) 33.863,56.109 ccw(c33.88,54.009) 33.644,51.922 ; 33.644,83.92 cw(c33.565,82.923) 34.031,83.808 ccw(c33.565,82.923) 33.644,83.92 ; 33.644,83.923 cw(c33.88,86.009) 33.864,88.109 ccw(c33.88,86.009) 33.644,83.923 ; 33.644,115.919 cw(c33.565,114.922) 34.031,115.807 ccw(c33.565,114.922) 33.644,115.919 ; 33.644,115.922 cw(c33.88,118.009) 33.863,120.109 ccw(c33.88,118.009) 33.644,115.922 ; 34.033,53.549 cw(c34.214,52.565) 34.24,53.565 ccw(c34.214,52.565) 34.033,53.549 ; 34.033,85.549 cw(c34.214,84.566) 34.24,85.566 ccw(c34.214,84.566) 34.033,85.549 ; 34.033,117.549 cw(c34.214,116.565) 34.24,117.565 ccw(c34.214,116.565) 34.033,117.549 ; 34.06,60.607 cw(c50.052,54.838) 45.954,71.337 ccw(c50.052,54.838) 34.06,60.607 ; 34.06,92.607 cw(c50.052,86.839) 45.954,103.338 ccw(c50.052,86.839) 34.06,92.607 ; 34.06,124.607 cw(c50.052,118.838) 45.954,135.337 ccw(c50.052,118.838) 34.06,124.607 ; 34.066,57.873 ccw(c34.538,58.755) 34.459,57.758 cw(c34.538,58.755) 34.066,57.873 ; 34.066,89.873 ccw(c34.538,90.755) 34.46,89.758 cw(c34.538,90.755) 34.066,89.873 ; 34.066,121.873 ccw(c34.538,122.755) 34.459,121.758 cw(c34.538,122.755) 34.066,121.873 ; 34.24,53.568 ccw(c34.223,55.668) 34.459,57.755 cw(c34.223,55.668) 34.24,53.568 ; 34.24,85.569 ccw(c34.224,87.669) 34.459,89.755 cw(c34.224,87.669) 34.24,85.569 ; 34.24,117.568 ccw(c34.223,119.668) 34.459,121.755 cw(c34.223,119.668) 34.24,117.568 ; 42.923,135.279 56.923,135.279 42.923,135.279 ; 43.052,39.346 57.052,39.346 43.052,39.346 ; 43.052,71.346 57.052,71.346 43.052,71.346 ; 45.952,71.346 54.152,71.346 45.952,71.346 ; 45.952,103.346 54.152,103.346 45.952,103.346 ; 54.149,71.337 cw(c50.052,54.838) 66.063,60.55 ccw(c50.052,54.838) 54.149,71.337 ; 54.15,103.338 cw(c50.052,86.839) 66.064,92.551 ccw(c50.052,86.839) 54.15,103.338 ; 57.051,39.346 ccw(c50.052,54.838) 66.068,49.14 cw(c50.052,54.838) 57.051,39.346 ; 57.052,71.347 ccw(c50.052,86.839) 66.068,81.141 cw(c50.052,86.839) 57.052,71.347 ; 65.644,51.919 cw(c65.565,50.922) 66.031,51.807 ccw(c65.565,50.922) 65.644,51.919 ; 65.644,51.922 cw(c65.88,54.009) 65.863,56.109 ccw(c65.88,54.009) 65.644,51.922 ; 65.644,83.92 cw(c65.565,82.923) 66.031,83.808 ccw(c65.565,82.923) 65.644,83.92 ; 65.644,83.923 cw(c65.88,86.009) 65.864,88.109 ccw(c65.88,86.009) 65.644,83.923 ; 65.644,115.919 cw(c65.565,114.922) 66.031,115.807 ccw(c65.565,114.922) 65.644,115.919 ; 65.644,115.922 cw(c65.88,118.009) 65.863,120.109 ccw(c65.88,118.009) 65.644,115.922 ; 66.033,53.549 cw(c66.214,52.565) 66.24,53.565 ccw(c66.214,52.565) 66.033,53.549 ; 66.033,85.549 cw(c66.214,84.566) 66.24,85.566 ccw(c66.214,84.566) 66.033,85.549 ; 66.033,117.549 cw(c66.214,116.565) 66.24,117.565 ccw(c66.214,116.565) 66.033,117.549 ; 66.06,60.607 cw(c82.052,54.838) 77.954,71.337 ccw(c82.052,54.838) 66.06,60.607 ; 66.06,92.607 cw(c82.052,86.839) 77.954,103.338 ccw(c82.052,86.839) 66.06,92.607 ; 66.06,124.607 cw(c82.052,118.838) 77.954,135.337 ccw(c82.052,118.838) 66.06,124.607 ; 66.066,57.873 ccw(c66.538,58.755) 66.459,57.758 cw(c66.538,58.755) 66.066,57.873 ; 66.066,121.873 ccw(c66.538,122.755) 66.459,121.758 cw(c66.538,122.755) 66.066,121.873 ; 66.066,89.873 ccw(c66.538,90.755) 66.46,89.758 cw(c66.538,90.755) 66.066,89.873 ; 66.24,53.568 ccw(c66.223,55.668) 66.459,57.755 cw(c66.223,55.668) 66.24,53.568 ; 66.24,85.569 ccw(c66.224,87.669) 66.459,89.755 cw(c66.224,87.669) 66.24,85.569 ; 66.24,117.568 ccw(c66.223,119.668) 66.459,121.755 cw(c66.223,119.668) 66.24,117.568 ; 74.923,135.279 88.923,135.279 74.923,135.279 ; 75.052,39.346 89.052,39.346 75.052,39.346 ; 75.052,71.346 89.052,71.346 75.052,71.346 ; 77.952,71.346 86.152,71.346 77.952,71.346 ; 77.952,103.346 86.152,103.346 77.952,103.346 ; 86.149,71.337 cw(c82.052,54.838) 98.063,60.55 ccw(c82.052,54.838) 86.149,71.337 ; 86.15,103.338 cw(c82.052,86.839) 98.064,92.551 ccw(c82.052,86.839) 86.15,103.338 ; 89.051,39.346 ccw(c82.052,54.838) 98.068,49.14 cw(c82.052,54.838) 89.051,39.346 ; 89.052,71.347 ccw(c82.052,86.839) 98.068,81.141 cw(c82.052,86.839) 89.052,71.347 ; 97.644,51.919 cw(c97.565,50.922) 98.031,51.807 ccw(c97.565,50.922) 97.644,51.919 ; 97.644,51.922 cw(c97.88,54.009) 97.863,56.109 ccw(c97.88,54.009) 97.644,51.922 ; 97.644,83.92 cw(c97.565,82.923) 98.031,83.808 ccw(c97.565,82.923) 97.644,83.92 ; 97.644,83.923 cw(c97.88,86.009) 97.864,88.109 ccw(c97.88,86.009) 97.644,83.923 ; 97.644,115.919 cw(c97.565,114.922) 98.031,115.807 ccw(c97.565,114.922) 97.644,115.919 ; 97.644,115.922 cw(c97.88,118.009) 97.863,120.109 ccw(c97.88,118.009) 97.644,115.922 ; 98.033,53.549 cw(c98.214,52.565) 98.24,53.565 ccw(c98.214,52.565) 98.033,53.549 ; 98.033,85.549 cw(c98.214,84.566) 98.24,85.566 ccw(c98.214,84.566) 98.033,85.549 ; 98.033,117.549 cw(c98.214,116.565) 98.24,117.565 ccw(c98.214,116.565) 98.033,117.549 ; 98.06,60.607 cw(c114.052,54.838) 109.954,71.337 ccw(c114.052,54.838) 98.06,60.607 ; 98.06,92.607 cw(c114.052,86.839) 109.954,103.338 ccw(c114.052,86.839) 98.06,92.607 ; 98.066,57.873 ccw(c98.538,58.755) 98.459,57.758 cw(c98.538,58.755) 98.066,57.873 ; 98.066,89.873 ccw(c98.538,90.755) 98.46,89.758 cw(c98.538,90.755) 98.066,89.873 ; 98.066,121.873 ccw(c98.538,122.755) 98.459,121.758 cw(c98.538,122.755) 98.066,121.873 ; 98.24,53.568 ccw(c98.223,55.668) 98.459,57.755 cw(c98.223,55.668) 98.24,53.568 ; 98.24,85.569 ccw(c98.224,87.669) 98.459,89.755 cw(c98.224,87.669) 98.24,85.569 ; 98.24,117.568 ccw(c98.223,119.668) 98.459,121.755 cw(c98.223,119.668) 98.24,117.568 ; 106.923,135.279 120.923,135.279 106.923,135.279 ; 107.052,39.346 121.052,39.346 107.052,39.346 ; 107.052,71.346 121.052,71.346 107.052,71.346 ; 109.952,71.346 118.152,71.346 109.952,71.346 ; 109.952,103.346 118.152,103.346 109.952,103.346 ; 118.149,71.337 cw(c114.052,54.838) 130.063,60.55 ccw(c114.052,54.838) 118.149,71.337 ; 118.15,103.338 cw(c114.052,86.839) 130.064,92.551 ccw(c114.052,86.839) 118.15,103.338 ; 121.051,39.346 ccw(c114.052,54.838) 130.068,49.14 cw(c114.052,54.838) 121.051,39.346 ; 121.052,71.347 ccw(c114.052,86.839) 130.068,81.141 cw(c114.052,86.839) 121.052,71.347 ; 129.644,51.919 cw(c129.565,50.922) 130.031,51.807 ccw(c129.565,50.922) 129.644,51.919 ; 129.644,115.919 cw(c129.565,114.922) 130.031,115.807 ccw(c129.565,114.922) 129.644,115.919 ; 129.644,51.922 cw(c129.88,54.009) 129.863,56.109 ccw(c129.88,54.009) 129.644,51.922 ; 129.644,83.92 cw(c129.565,82.923) 130.031,83.808 ccw(c129.565,82.923) 129.644,83.92 ; 129.644,83.923 cw(c129.88,86.009) 129.864,88.109 ccw(c129.88,86.009) 129.644,83.923 ; 129.644,115.922 cw(c129.88,118.009) 129.863,120.109 ccw(c129.88,118.009) 129.644,115.922 ; 129.784,51.852 cw(c129.705,50.855) 130.172,51.74 ccw(c129.705,50.855) 129.784,51.852 ; 129.784,83.853 cw(c129.706,82.856) 130.172,83.74 ccw(c129.706,82.856) 129.784,83.853 ; 129.784,115.852 cw(c129.705,114.855) 130.172,115.74 ccw(c129.705,114.855) 129.784,115.852 ; 130.173,53.482 cw(c130.354,52.498) 130.38,53.498 ccw(c130.354,52.498) 130.173,53.482 ; 130.173,85.482 cw(c130.354,84.499) 130.38,85.498 ccw(c130.354,84.499) 130.173,85.482 ; 130.173,117.482 cw(c130.354,116.498) 130.38,117.498 ccw(c130.354,116.498) 130.173,117.482 ; 130.2,60.54 cw(c146.192,54.771) 142.094,71.27 ccw(c146.192,54.771) 130.2,60.54 ; 130.201,92.54 cw(c146.192,86.772) 142.094,103.271 ccw(c146.192,86.772) 130.201,92.54 ; 130.206,57.806 ccw(c130.678,58.687) 130.6,57.69 cw(c130.678,58.687) 130.206,57.806 ; 130.207,89.806 ccw(c130.679,90.688) 130.6,89.691 cw(c130.679,90.688) 130.207,89.806 ; 130.206,121.806 ccw(c130.678,122.687) 130.6,121.69 cw(c130.678,122.687) 130.206,121.806 ; 130.38,53.501 ccw(c130.364,55.601) 130.599,57.688 cw(c130.364,55.601) 130.38,53.501 ; 130.38,117.501 ccw(c130.364,119.601) 130.599,121.688 cw(c130.364,119.601) 130.38,117.501 ; 130.38,85.501 ccw(c130.364,87.601) 130.6,89.688 cw(c130.364,87.601) 130.38,85.501 ; 138.923,135.279 152.923,135.279 138.923,135.279 ; 139.192,39.279 153.192,39.279 139.192,39.279 ; 139.192,71.279 153.192,71.279 139.192,71.279 ; 142.092,71.279 150.292,71.279 142.092,71.279 ; 142.092,103.279 150.292,103.279 142.092,103.279 ; 150.29,71.27 cw(c146.192,54.771) 162.204,60.483 ccw(c146.192,54.771) 150.29,71.27 ; 150.29,103.271 cw(c146.192,86.772) 162.204,92.483 ccw(c146.192,86.772) 150.29,103.271 ; 153.192,39.279 ccw(c146.192,54.771) 162.208,49.073 cw(c146.192,54.771) 153.192,39.279 ; 153.192,71.28 ccw(c146.192,86.772) 162.209,81.073 cw(c146.192,86.772) 153.192,71.28 ; 161.784,51.852 cw(c161.705,50.855) 162.172,51.74 ccw(c161.705,50.855) 161.784,51.852 ; 161.784,51.855 cw(c162.02,53.942) 162.004,56.042 ccw(c162.02,53.942) 161.784,51.855 ; 161.784,83.853 cw(c161.706,82.856) 162.172,83.74 ccw(c161.706,82.856) 161.784,83.853 ; 161.785,83.856 cw(c162.02,85.942) 162.004,88.042 ccw(c162.02,85.942) 161.785,83.856 ; 161.784,115.852 cw(c161.705,114.855) 162.172,115.74 ccw(c161.705,114.855) 161.784,115.852 ; 161.784,115.855 cw(c162.02,117.942) 162.004,120.042 ccw(c162.02,117.942) 161.784,115.855

## Other copper
Top Layer:
  region net NewNet4: -10.098,11.914 -10.505,12.321 -11.343,12.321 -13.197,10.467 -13.197,7.774 -12.435,7.012 -10.987,7.012 -10.505,7.495 -10.505,10.34 -10.098,10.746
  region net NewNet2: 4.496,10.312 4.496,12.192 4.191,12.497 2.134,12.497 1.931,12.293 1.931,11.531 1.829,11.43 -2.337,11.43 -2.641,11.735 -2.641,12.293 -2.845,12.497 -4.648,12.497 -4.927,12.217 -4.927,10.033 -4.521,10.439 -3.276,10.439 -2.718,10.998 2.616,10.998 3.302,10.312
  region net NewNet2: 4.775,-9.83 9.246,-9.83 10.071,-9.004 10.071,-5.177 7.341,-8.204 5.961,-9.288
  region net NewNet2: -13.182,-2.997 -13.182,1.981 -16.053,4.851 -16.053,5.207 -15.646,5.613 -11.176,1.143 -11.15,1.143 -11.15,-3.099
  region net NewNet2: -9.982,-4.877 -10.388,-4.471 -12.878,-4.471 -13.182,-4.166 -13.182,-2.997 -11.176,-0.991 -11.176,-0.915
  region net NewNet3: 12.802,10.515 10.948,12.37 9.83,12.37 9.576,12.116 9.576,10.871 10.465,9.982 10.465,7.29 10.968,6.787 12.222,6.787 12.802,7.366
  region net NewNet1: 4.699,-12.776 3.91,-11.987 0.824,-11.987 0.33,-12.48 0.33,-14.377 0.737,-14.783 4.013,-14.783 4.699,-14.097

## Silkscreen, mask and mechanical layers (free items; w line width, h text height)
Top Overlay:
  lines w0.25: -16.104,-2.591 -15.498,-4.933 -10.56,-3.677 -11.176,-1.295 -16.104,-2.591
  text "拼版示意图" at 75.209,13.64 h10
  text "06005B" at -9.017,-9.754 h1.1 r330
  text "20190409" at -10.388,-11.075 h1.1 r330
Bottom Overlay:
  circle w0.2: c-11.557,6.807 r1.8
  circle w0.2: c11.581,6.522 r1.8
  circle w0.2: c11.908,-6.875 r1.8
  circle w0.2: c0.147,-13.106 r1.8
  circle w0.2: c0,13.75 r1.8
  circle w0.2: c-11.908,-6.875 r1.8
  region: -12.675,-3.835 -13.054,-2.255 -13.993,-2.48 -13.613,-4.061
  text "V1.2 94V-0" at 13.157,4.343 h1 r91
  text "21024B" at -12.293,4.267 h1 r270
  text "RA1 25-2" at 11.862,4.267 h1 r91
  text "-" at -15.342,-2.464 h1.1 r354.5
  text "+" at -11.43,-4.394 h1.1
  text "1735" at -2.032,-11.76 h1 r60
  text "E123995" at -3.733,-11.963 h1 r331
  text "KB-3151C" at -4.567,-13.306 h1 r331
  text "SM1 504" at -5.275,-14.654 h1 r331
Top Solder:
  region: 66.599,-35.458 66.599,-33.503 63.322,-33.503 63.322,-35.458
  region: 65.938,-18.136 65.938,-15.875 62.408,-15.875 62.408,-18.136
  region: 73.66,-44.069 73.66,-41.885 70.028,-41.885 70.028,-44.069
  region: 66.523,-39.167 66.523,-37.211 63.246,-37.211 63.246,-39.167
  region: 61.316,-27.813 61.316,-25.756 58.039,-25.756 58.039,-27.813
  region: 53.188,-22.225 53.188,-20.422 49.733,-20.422 49.733,-22.225
  region: 53.34,-14.173 53.34,-11.862 49.886,-11.862 49.886,-14.173
  lines w1.2: -12.638,8.739 -11.673,7.907 ; -2.605,-13.892 -1.544,-13.155 ; 1.312,-13.486 2.398,-12.546 ; 11.771,3.812 12.188,4.952 ; 11.8,8.079 12.243,9.347
  text "HTY-21024B V02" at 113.64,-48.895 h1.5

## Dimensions
-60.948,34.346 to -61.143,140.279 on Keep-Out Layer
-61.948,39.346 to 162.076,39.346 on Keep-Out Layer

## Text inside footprints (layer, text, board x,y; h text height)
Q20: Top Overlay "2.0" at 69.461,-17.831 h1.52; Top Overlay "0.8" at 81.932,-22.098 h1.52; Top Overlay "1.0" at 68.622,-21.998 h1.52; Top Overlay "1.2" at 55.22,-21.998 h1.52; Top Overlay "1.0" at 56.159,-17.909 h1.52; Top Overlay "0.5" at 43.332,-17.856 h1.52; Top Overlay "1.6" at 42.799,-21.998 h1.52; Top Overlay "oZ" at 72.848,-17.856 h1.52; Top Overlay "oZ" at 59.372,-17.856 h1.52; Top Overlay "mm" at 85.132,-22.022 h1.5; Top Overlay "mm" at 71.442,-21.92 h1.5; Top Overlay "mm" at 58.039,-21.92 h1.5; Top Overlay "mm" at 45.618,-21.971 h1.5; Top Overlay "oZ" at 46.939,-17.856 h1.52; Top Overlay "FR-1" at 44.374,-13.945 h1.52; Top Overlay "FR-4" at 56.261,-13.97 h1.52; Top Overlay "CEM-1" at 68.597,-13.97 h1.52; Top Overlay "22F" at 84.597,-13.97 h1.52; Top Overlay "94V0" at 103.761,-14.041 h1.52; Top Overlay "94HB" at 116.112,-14.041 h1.52